# EAGLE board BUF_1U_6HP_fpb (EAGLE 6.6.0)
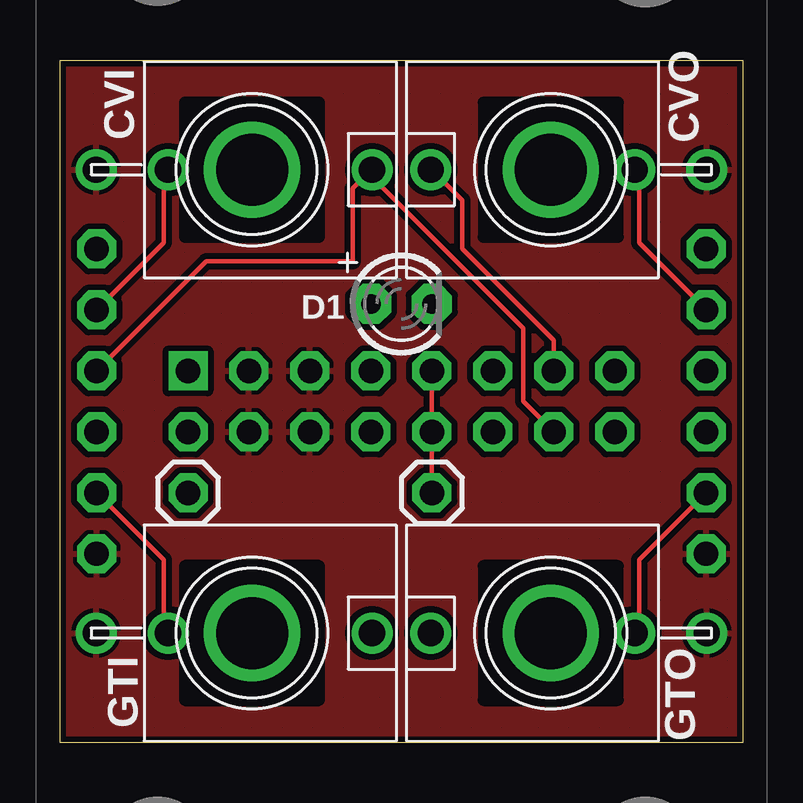
[diagram p0: board, top side]
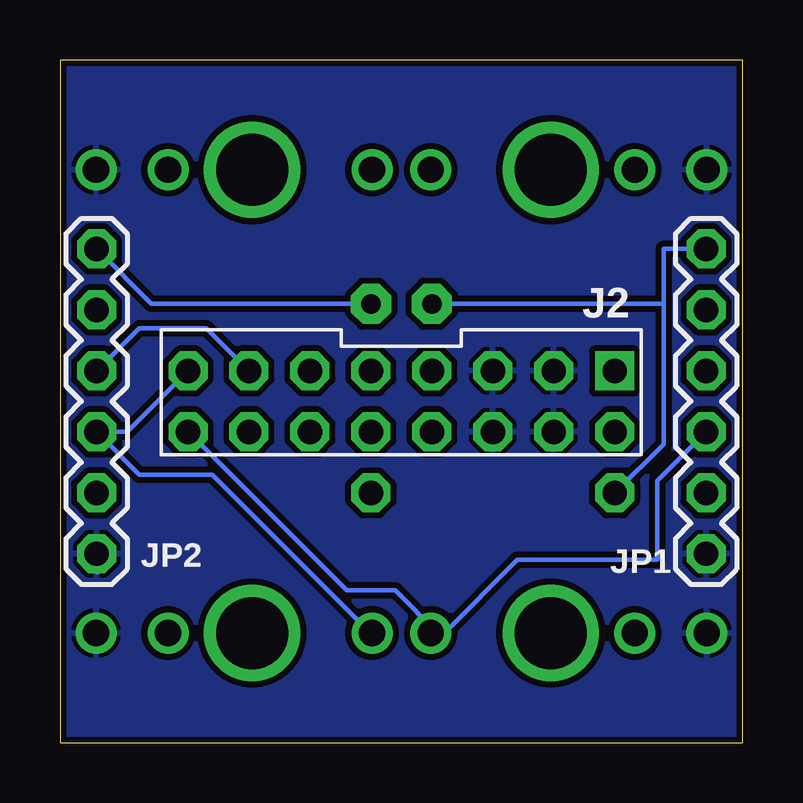
[diagram p1: board, bottom side, seen from below]

Size 28.45 x 28.45 mm. Coordinates in mm from the lower left corner, seen from the top.
Outline: 0,28.45 28.45,28.45 28.45,0 0,0 0,28.45
Copper layers (1*16): Top 0.035mm / dielectric 1.5mm / Bottom 0.035mm
Design rules "PatternAgents_7mil": minimum track width 7mil, minimum drill 14mil, track to track 7mil, track to pad 7mil, pad to pad 7mil, via to via 7mil, smd to smd 7mil, copper to edge 7mil, drill to drill 7mil, minimum pad ring 12mil, minimum via ring 10mil, stop-mask expansion 4mil, vias tented up to drill 25mil, thermal gap 7mil

## Footprints (pad centres in the part's own frame; a part is rotated, then mirrored left to right if it is on the bottom)
WQP_PJ301M-12 = drill 3: HOLE 0,0 | drill 1.1: SLEEVE 0,-6.5; TIP 0,5; TIP_SW 0,-3.5
LED3MM = drill 0.813 pad 1.676 octagon: A -1.27,0; K 1.27,0
ERA-NOSILK = drill 1.016 square: 1 -8.89,-1.27 | drill 1.016 octagon: 2 -8.89,1.27; 3 -6.35,-1.27; 4 -6.35,1.27; 5 -3.81,-1.27; 6 -3.81,1.27; 7 -1.27,-1.27; 8 -1.27,1.27; 9 1.27,-1.27; 10 1.27,1.27; 11 3.81,-1.27; 12 3.81,1.27; 13 6.35,-1.27; 14 6.35,1.27; 15 8.89,-1.27; 16 8.89,1.27
1X01 = drill 1.016 octagon: 1 0,0
1X06 = drill 1.016 octagon: 1 0,0; 2 2.54,0; 3 5.08,0; 4 7.62,0; 5 10.16,0; 6 12.7,0

## Placement (x,y rotation side)
CVI  JACK-3_5MM-MONO-SW-WQP_PJ302-12  [WQP_PJ301M-12]  8,23.88 270 top
CVO  JACK-3_5MM-MONO-SW-WQP_PJ302-12  [WQP_PJ301M-12]  20.45,23.88 90 top
D1  LED  [LED3MM]  14.22,18.29 0 top
GTI  JACK-3_5MM-MONO-SW-WQP_PJ302-12  [WQP_PJ301M-12]  8,4.57 270 top
GTO  JACK-3_5MM-MONO-SW-WQP_PJ302-12  [WQP_PJ301M-12]  20.45,4.57 90 top
J2  ERA-NOSILK  [ERA-NOSILK]  14.22,14.22 180 bottom
J12  [1X01]  15.49,10.41 0 top
J13  [1X01]  5.33,10.41 0 top
JP1  [1X06]  1.52,7.87 90 bottom
JP2  [1X06]  26.92,7.87 90 bottom
TOMMOXON  BY_CC_SA_TEXTNULL  [NULL_SYM]  -1.02,-7.37 0 top  (outside the outline)

## Library data of the parts
CVI CVO GTI GTO JP1 JP2 = halcyonmod_Connectors
D1 = halcyonmod_Optoelectronics
J2 = ERA
J12 J13 = PatternAgents-ProtoPads
TOMMOXON = PatternAgents-Logos

## Nets
CVI: CVI.TIP J2.14 JP1.4
CVI_NOR: CVI.TIP_SW JP1.5
CVO: CVO.TIP J2.13 JP2.4
CVO_NOR: CVO.TIP_SW JP2.5
GND: CVI.SLEEVE CVO.SLEEVE GTI.SLEEVE GTO.SLEEVE J2.3 J2.4 J2.5 J2.6 JP1.1 JP2.1
GTI: GTI.TIP J2.16 JP1.3
GTI_NOR: GTI.TIP_SW JP1.2
GTO: GTO.TIP J2.15 JP2.3
GTO_NOR: GTO.TIP_SW JP2.2
LED_A: D1.A J13.1 JP1.6
LED_K: D1.K JP2.6
N$1: J2.9 J2.10 J12.1

## Tracks (layer width: path | path; a pad name or v marks a point on that pad's centre or on a via)
CVI
  Top 0.178: JP1.4 6.1,20.07 12.19,20.07 12.19,23.11 12.95,23.88 CVI.TIP 13.21,23.88 13.21,23.37 19.3,17.27 19.3,14.22 J2.14
CVI_NOR
  Top 0.178: JP1.5 4.32,20.83 4.32,23.88 CVI.TIP_SW
CVO
  Top 0.178: J2.13 20.57,16.76 16.76,20.57 16.76,22.61 15.49,23.88 CVO.TIP
  Bottom 0.178: J2.13 22.35,17.27 25.15,17.27 JP2.4
CVO_NOR
  Top 0.178: JP2.5 24.13,20.83 24.13,23.88 CVO.TIP_SW
GND
  Bottom 0.178: 26.92,7.11 JP2.1
  pour Top (isolate 0.254, hatched): 0,28.45 28.45,28.45 28.45,0 0,0
  pour Bottom (isolate 0.254, hatched): 0,28.45 28.45,28.45 28.45,0 0,0
GTI
  Bottom 0.178: JP1.3 3.56,10.92 3.56,7.62 9.4,7.62 12.45,4.57 12.7,4.57 | 12.7,4.57 GTI.TIP 12.95,4.57 | J2.16 16.51,6.35 14.48,6.35 12.7,4.57
GTI_NOR
  Top 0.178: JP1.2 4.32,7.62 4.32,4.57 GTI.TIP_SW
GTO
  Bottom 0.178: J2.15 25.65,12.95 JP2.3 25.15,11.18 22.1,11.18 15.49,4.57 GTO.TIP
GTO_NOR
  Top 0.178: JP2.2 24.13,7.62 24.13,4.57 GTO.TIP_SW
LED_A
  Bottom 0.178: J13.1 3.3,12.45 3.3,18.29 | 3.3,18.29 3.3,20.57 JP1.6 | 3.3,18.29 D1.A
LED_K
  Bottom 0.178: JP2.6 24.64,18.29 D1.K
N$1
  Top 0.178: J12.1 J2.10 J2.9